# Altium PCB 0007-Optical_Tracker.pcbdoc
Units mm, origin at the board's own origin, x right, y up, seen from the top; angles counter-clockwise.
Board outline 51.4 x 24 mm, 4 copper layers (Top Layer, VDD Plane, GND Plane, Bottom Layer), stack 1.682 mm thick; 67 components, 51 nets, 276 pads, 66 vias.
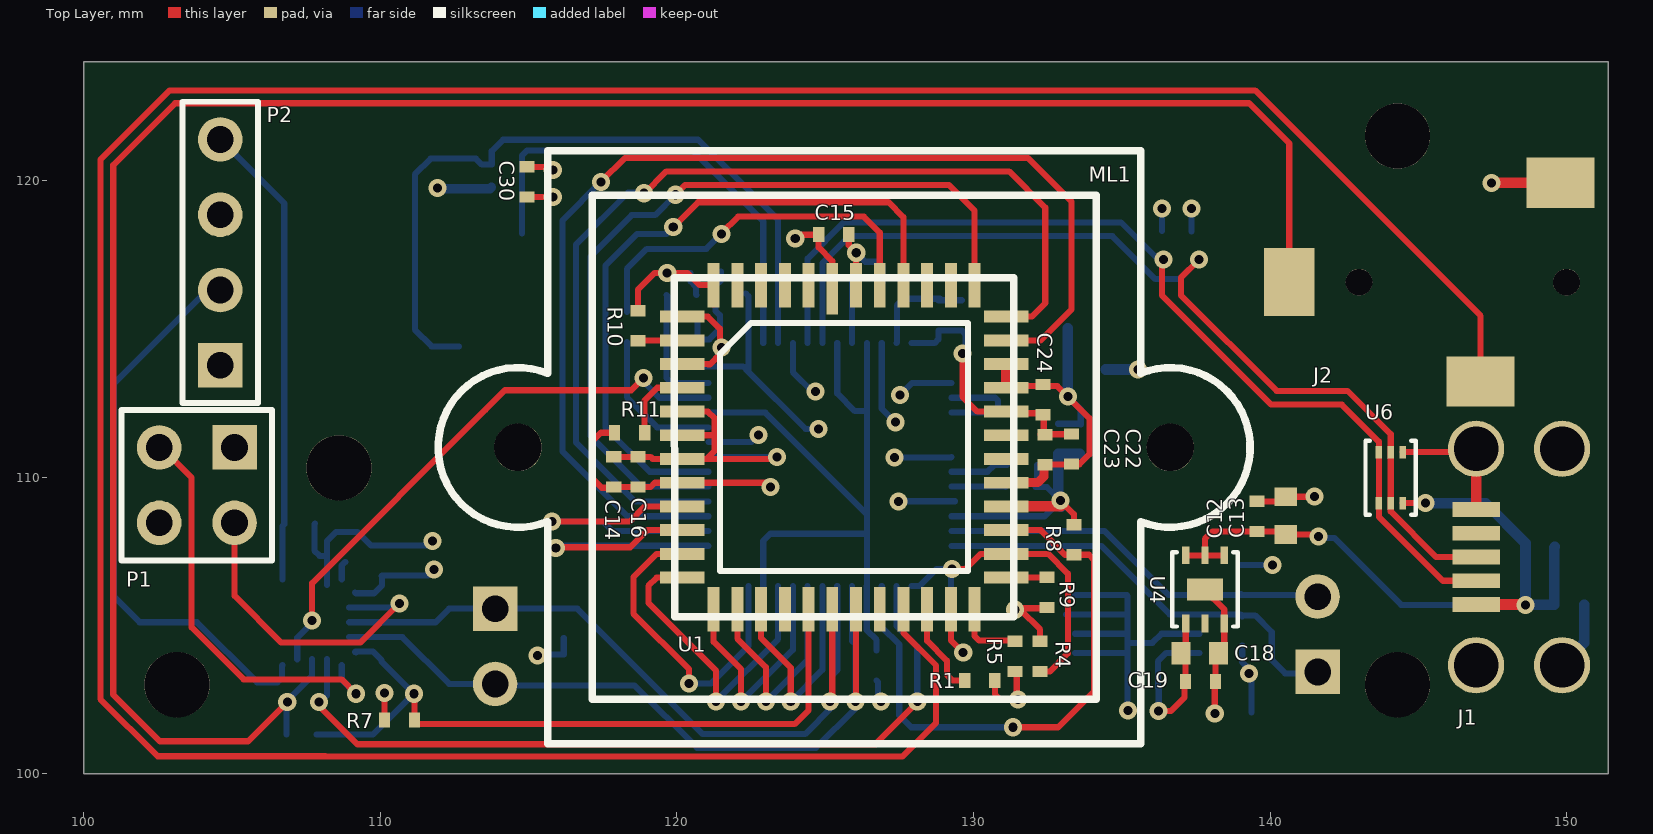
[diagram p0: Top Layer view]
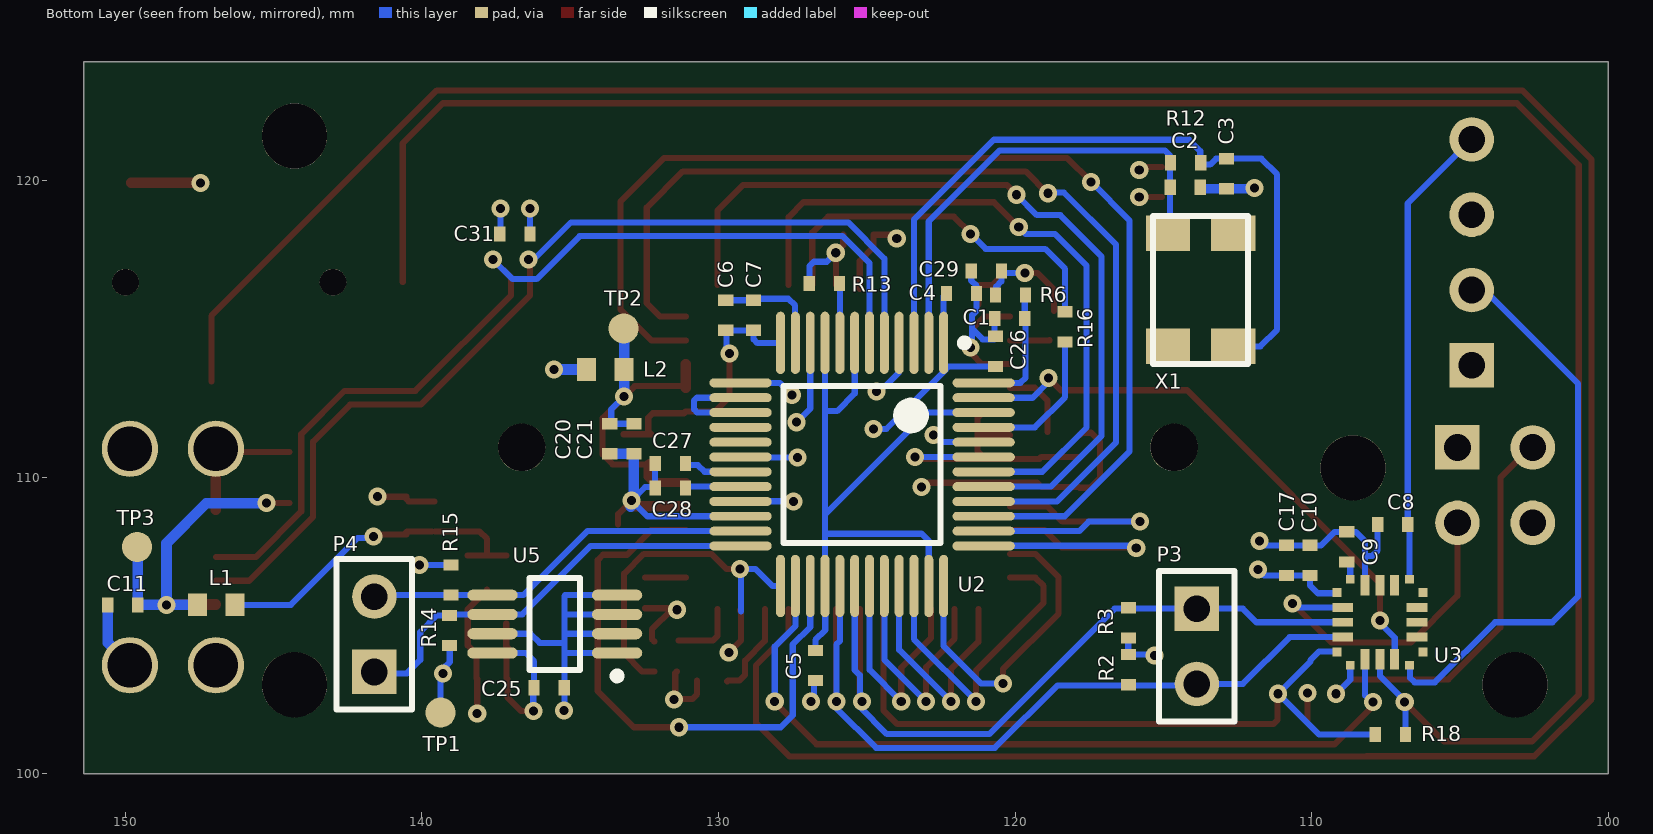
[diagram p1: Bottom Layer view, seen from below]
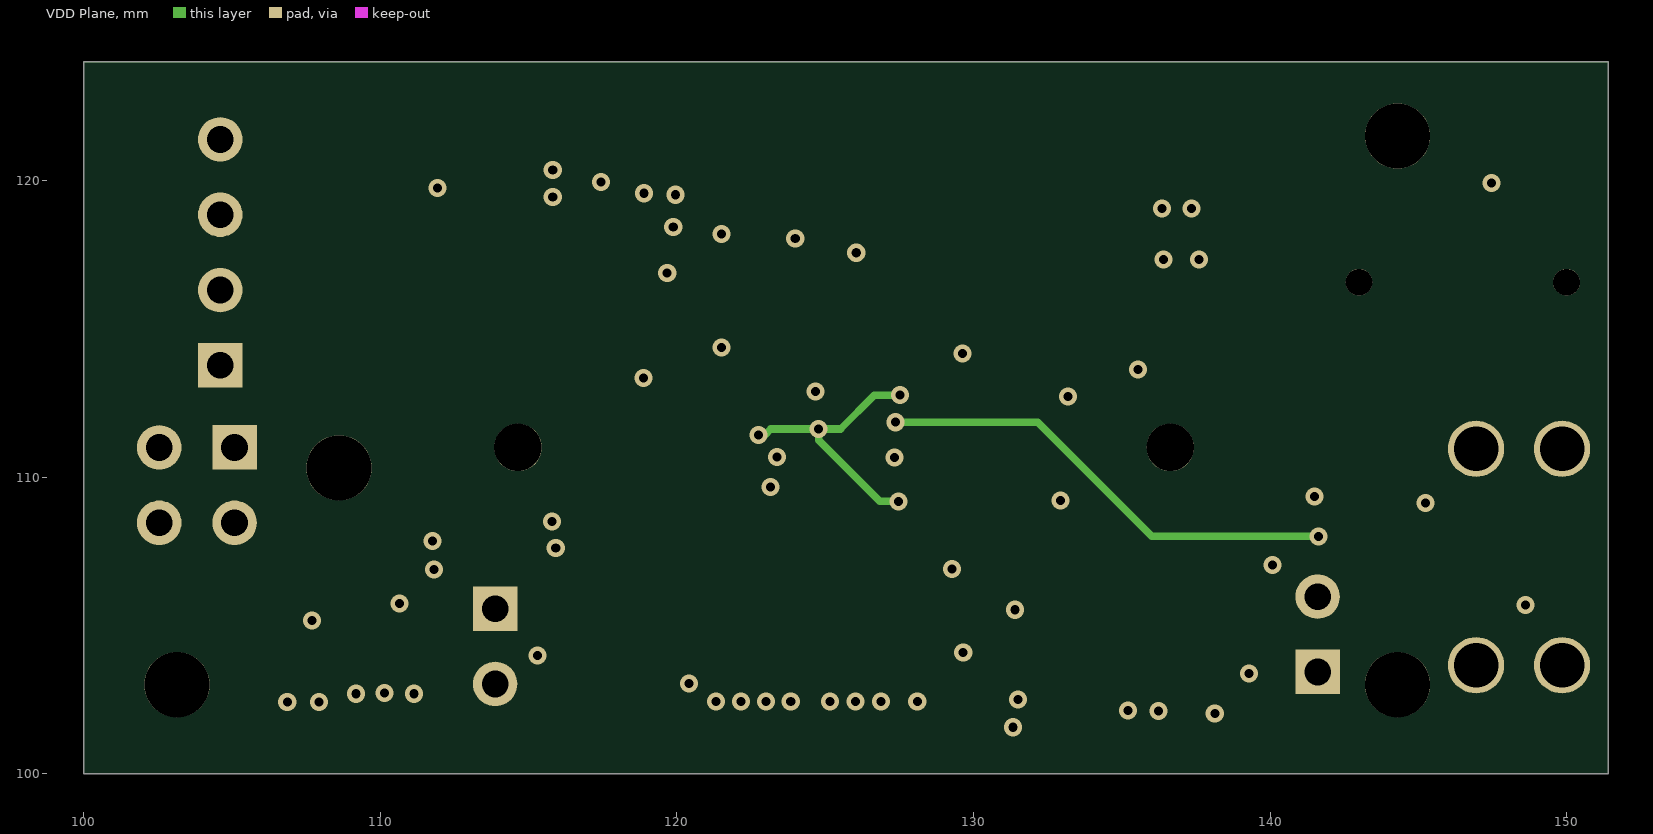
[diagram p2: VDD Plane]

## Layer stack, top to bottom
Top Solder: solder mask 0.0102, Solder Resist, Dk 3.5
Top Layer: signal copper 0.0356
Dielectric1: prepreg 0.17, FR-4, Dk 4.8
VDD Plane: signal copper 0.0356
Dielectric3: core 1.2, FR-4, Dk 4.8
GND Plane: signal copper 0.0356
Dielectric2: prepreg 0.17, FR-4, Dk 4.8
Bottom Layer: signal copper 0.0356
Bottom Solder: solder mask 0.0102, Solder Resist, Dk 3.5

## Board outline
100,100 100,124 151.4,124 151.4,100

## Design rules (kind name [scope] priority, off if disabled: settings)
AssemblyTestPointUsage [All] p0: scope1count=1 scope1_0_kind=Board scope1_0_value=Board scope2count=1 scope2_0_kind=Board scope2_0_value=Board commentlength=0
AssemblyTestpoint [All] p0: scope1count=1 scope1_0_kind=Board scope1_0_value=Board scope2count=1 scope2_0_kind=Board scope2_0_value=Board commentlength=0
Clearance [All] p0: scope1count=1 scope1_0_kind=Board scope1_0_value=Board scope2count=1 scope2_0_kind=Board scope2_0_value=Board commentlength=0 gap=0.152
Clearance [All] p1: gap=0.152 ignorepadtopadclearanceinfootprint=FALSE
ComponentClearance [All] p0: scope1count=1 scope1_0_kind=Board scope1_0_value=Board scope2count=1 scope2_0_kind=Board scope2_0_value=Board commentlength=0 gap=0.254 collisioncheckmode=3
DiffPairsRouting [All] p0: scope1count=1 scope1_0_kind=Board scope1_0_value=Board scope2count=1 scope2_0_kind=Board scope2_0_value=Board commentlength=0
DiffPairsRouting [All] p1: maxlimit=0.254 minlimit=0.254 mostfreqgap=0.254 toplayer_minwidth=0.381 toplayer_maxwidth=0.381 toplayer_prefwidth=0.381 midlayer1_minwidth=0.381 midlayer1_maxwidth=0.381 midlayer1_prefwidth=0.381 midlayer2_minwidth=0.381 midlayer2_maxwidth=0.381 midlayer2_prefwidth=0.381 bottomlayer_minwidth=0.381 bottomlayer_maxwidth=0.381 bottomlayer_prefwidth=0.381 maxuncoupledlength=12.7
FabricationTestPointUsage [All] p0: scope1count=1 scope1_0_kind=Board scope1_0_value=Board scope2count=1 scope2_0_kind=Board scope2_0_value=Board commentlength=0 valid=0 allowmultiple=FALSE
FabricationTestpoint [All] p0: scope1count=1 scope1_0_kind=Board scope1_0_value=Board scope2count=1 scope2_0_kind=Board scope2_0_value=Board commentlength=0 side=3 testpointundercomponent=TRUE minsize=1.016 maxsize=2.54 preferedsize=1.524 minholesize=0 maxholesize=1.016 preferedholesize=0.813 testpointgrid=0.025
FanoutControl Fanout_Default [All] p0: scope1count=1 scope1_0_kind=Board scope1_0_value=Board scope2count=1 scope2_0_kind=Board scope2_0_value=Board commentlength=30 // Fanout_Default (Default Rule)
FanoutControl Fanout_Small [All] p0 off: scope1count=1 scope1_0_kind=Board scope1_0_value=Board scope2count=1 scope2_0_kind=Board scope2_0_value=Board commentlength=84 // Protel DXP Scope 1 Expression Was: (CompPinCount < 5)   Fanout_Small (Default Rule)
FanoutControl Fanout_SOIC [All] p0 off: scope1count=1 scope1_0_kind=Board scope1_0_value=Board scope2count=1 scope2_0_kind=Board scope2_0_value=Board commentlength=71 // Protel DXP Scope 1 Expression Was: IsSOIC   Fanout_SOIC (Default Rule)
FanoutControl Fanout_LCC [All] p0 off: scope1count=1 scope1_0_kind=Board scope1_0_value=Board scope2count=1 scope2_0_kind=Board scope2_0_value=Board commentlength=69 // Protel DXP Scope 1 Expression Was: IsLCC   Fanout_LCC (Default Rule)
FanoutControl Fanout_BGA [All] p0 off: scope1count=1 scope1_0_kind=Board scope1_0_value=Board scope2count=1 scope2_0_kind=Board scope2_0_value=Board commentlength=69 // Protel DXP Scope 1 Expression Was: IsBGA   Fanout_BGA (Default Rule)
Height [All] p0: scope1count=1 scope1_0_kind=Board scope1_0_value=Board scope2count=1 scope2_0_kind=Board scope2_0_value=Board commentlength=0
HoleSize [All] p0: scope1count=1 scope1_0_kind=Board scope1_0_value=Board scope2count=1 scope2_0_kind=Board scope2_0_value=Board commentlength=0 absolutevalues=TRUE maxlimit=2.54 minlimit=0.025 maxpercent=80.000 minpercent=20.000
HoleToHoleClearance [All] p0: scope1count=1 scope1_0_kind=Board scope1_0_value=Board scope2count=1 scope2_0_kind=Board scope2_0_value=Board commentlength=0
LayerPairs [All] p0: scope1count=1 scope1_0_kind=Board scope1_0_value=Board scope2count=1 scope2_0_kind=Board scope2_0_value=Board commentlength=0 enforce=TRUE
MinimumSolderMaskSliver [All] p0: scope1count=1 scope1_0_kind=Board scope1_0_value=Board scope2count=1 scope2_0_kind=Board scope2_0_value=Board commentlength=0
NetAntennae [All] p0: scope1count=1 scope1_0_kind=Board scope1_0_value=Board scope2count=1 scope2_0_kind=Board scope2_0_value=Board commentlength=0
PasteMaskExpansion [All] p0: scope1count=1 scope1_0_kind=Board scope1_0_value=Board scope2count=1 scope2_0_kind=Board scope2_0_value=Board commentlength=0 expansion=0
PlaneClearance [All] p0: scope1count=1 scope1_0_kind=Board scope1_0_value=Board scope2count=1 scope2_0_kind=Board scope2_0_value=Board commentlength=0 clearance=0.508
PlaneConnect [All] p0: scope1count=1 scope1_0_kind=Board scope1_0_value=Board scope2count=1 scope2_0_kind=Board scope2_0_value=Board commentlength=0 planeconnectstyle=Relief reliefexpansion=0.508 reliefentries=4 reliefconductorwidth=0.254 reliefairgap=0.254
PolygonConnect [All] p0: scope1count=1 scope1_0_kind=Board scope1_0_value=Board scope2count=1 scope2_0_kind=Board scope2_0_value=Board commentlength=0 connectstyle=Relief reliefconductorwidth=0.254 reliefentries=4 polygonreliefangle="90 Angle"
PolygonConnect [All] p1: connectstyle=Relief reliefconductorwidth=0.254 reliefentries=4 polygonreliefangle="90 Angle" airgapwidth=0.254
RoutingCorners [All] p0: scope1count=1 scope1_0_kind=Board scope1_0_value=Board scope2count=1 scope2_0_kind=Board scope2_0_value=Board commentlength=0 cornerstyle=45-Degree minsetback=2.54 maxsetback=2.54
RoutingLayers [All] p0: scope1count=1 scope1_0_kind=Board scope1_0_value=Board scope2count=1 scope2_0_kind=Board scope2_0_value=Board commentlength=0 top layer=Automatic mid layer 1=Automatic mid layer 2=Automatic bottom layer=Automatic
RoutingPriority [All] p0: scope1count=1 scope1_0_kind=Board scope1_0_value=Board scope2count=1 scope2_0_kind=Board scope2_0_value=Board commentlength=0
RoutingTopology [All] p0: scope1count=1 scope1_0_kind=Board scope1_0_value=Board scope2count=1 scope2_0_kind=Board scope2_0_value=Board commentlength=0 topology=Shortest
RoutingVias [All] p0: scope1count=1 scope1_0_kind=Board scope1_0_value=Board scope2count=1 scope2_0_kind=Board scope2_0_value=Board commentlength=0 holewidth=0.305 width=0.61 viastyle="Through Hole" minholewidth=0.305 minwidth=0.61 maxholewidth=0.305 maxwidth=0.61
RoutingVias [All] p1: holewidth=0.305 width=0.61 viastyle="Through Hole" minholewidth=0.305 minwidth=0.61 maxholewidth=0.305 maxwidth=0.61
ShortCircuit [All] p0: scope1count=1 scope1_0_kind=Board scope1_0_value=Board scope2count=1 scope2_0_kind=Board scope2_0_value=Board commentlength=0 allowed=FALSE
SilkToBoardRegionClearance [All] p0: scope1count=1 scope1_0_kind=Board scope1_0_value=Board scope2count=1 scope2_0_kind=Board scope2_0_value=Board commentlength=0
SilkToSilkClearance [All] p0: scope1count=1 scope1_0_kind=Board scope1_0_value=Board scope2count=1 scope2_0_kind=Board scope2_0_value=Board commentlength=0
SilkToSolderMaskClearance [All] p0 off: scope1count=1 scope1_0_kind=Board scope1_0_value=Board scope2count=1 scope2_0_kind=Board scope2_0_value=Board commentlength=44 // Protel DXP Scope 1 Expression Was: IsPad
SolderMaskExpansion [All] p0: scope1count=1 scope1_0_kind=Board scope1_0_value=Board scope2count=1 scope2_0_kind=Board scope2_0_value=Board commentlength=0 expansion=0.102
SolderMaskExpansion [All] p1: expansion=0.102 istentingtop=FALSE
UnRoutedNet [All] p0: scope1count=1 scope1_0_kind=Board scope1_0_value=Board scope2count=1 scope2_0_kind=Board scope2_0_value=Board commentlength=0
UnpouredPolygon [All] p0: scope1count=1 scope1_0_kind=Board scope1_0_value=Board scope2count=1 scope2_0_kind=Board scope2_0_value=Board commentlength=0
Width [All] p0: scope1count=1 scope1_0_kind=Board scope1_0_value=Board scope2count=1 scope2_0_kind=Board scope2_0_value=Board commentlength=0 maxlimit=0.356 minlimit=0.207 preferedwidth=0.254
Width [All] p1: maxlimit=0.356 minlimit=0.207 preferedwidth=0.254 toplayer_prefwidth=0.207 midlayer1_minwidth=0.254 midlayer1_maxwidth=0.254 midlayer2_minwidth=0.254 midlayer2_maxwidth=0.254 bottomlayer_prefwidth=0.207 minimp=50.000000 maximp=50.000000 favimp=50.000000
29 further rules are at their usual default settings.

## Classes and differential pairs
differential pair " ": +USBDATA_P -USBDATA_N

## Components (designator, comment, footprint, x,y, rotation, side; value= is the part's Value field where it differs from the comment)
C1 "1uF" CAP_CERAMIC_0402 120.179,115.355 r180 bottom
C2 "12pF" CAP_CERAMIC_0402 114.261,119.774 r0 bottom
C3 "12pF" CAP_CERAMIC_0402 112.864,120.231 r90 bottom
C4 "0.1uF" CAP_CERAMIC_0402 121.804,116.193 r180 bottom
C5 "0.1uF" CAP_CERAMIC_0402 126.732,103.645 r270 bottom
C6 "0.1uF" CAP_CERAMIC_0402 129.755,115.456 r270 bottom
C7 "4.7uF" CAP_CERAMIC_0402 128.815,115.456 r270 bottom
C8 "0.1uF" CAP_CERAMIC_0402 107.264,108.407 r0 bottom
C9 "0.1uF" CAP_CERAMIC_0402 108.814,107.645 r90 bottom
C10 "0.1uF" CAP_CERAMIC_0402 110.058,107.188 r90 bottom
C11 "2200pF" CAP_CERAMIC_0402 150.089,105.689 r0 bottom
C12 "2200pF" CAP_CERAMIC_0402 139.562,108.673 r90 top
C13 "10uF" CAP_CERAMIC_0603 140.527,108.699 r90 top
C14 "0.1uF" CAP_CERAMIC_0402 117.867,110.173 r90 top
C15 "1uF" CAP_CERAMIC_0402 125.284,118.174 r0 top
C16 "1uF" CAP_CERAMIC_0402 118.68,110.173 r90 top
C17 "0.1uF" CAP_CERAMIC_0402 110.846,107.188 r90 bottom
C18 "10uF" CAP_CERAMIC_0603 137.629,104.052 r0 top
C19 "0.1uF" CAP_CERAMIC_0402 137.654,103.112 r0 top
C20 "4.7uF" CAP_CERAMIC_0402 133.666,111.291 r270 bottom
C21 "0.1uF" CAP_CERAMIC_0402 132.853,111.291 r270 bottom
C22 "0.1uF" CAP_CERAMIC_0402 133.299,110.947 r90 top
C23 "0.1uF" CAP_CERAMIC_0402 132.41,110.922 r90 top
C24 "0.1uF" CAP_CERAMIC_0402 132.345,112.611 r270 top
C25 "0.1uF" CAP_CERAMIC_0402 135.712,102.895 r180 bottom
C26 "4.7uF" CAP_CERAMIC_0402 120.661,114.237 r90 bottom
C27 "4.7uF" CAP_CERAMIC_0402 131.623,110.465 r0 bottom
C28 "0.1uF" CAP_CERAMIC_0402 131.623,109.626 r0 bottom
C29 "0.1uF" CAP_CERAMIC_0402 120.966,116.955 r0 bottom
C30 "0.1uF" CAP_CERAMIC_0402 114.946,119.952 r270 top
C31 "0.1uF" CAP_CERAMIC_0402 136.868,118.199 r180 bottom
J1 "0513870578" 0513870578 146.948,107.303 r270 top
J2 "KYCON STX-2500-3NTR" KYCON_STX2500 151.5,116.574 r270 top locked
L1 "BLM18KG221SN1D" INDUCTOR_0603 146.939,105.689 r180 bottom
L2 "BLM18KG221SN1D" INDUCTOR_0603 133.819,113.627 r180 bottom
ML1 "CMT103" CMT103 125.636,111 r0 top locked
P1 "PPTC022LFBN-RC" HDR2X2 105.08,110.998 r180 top
P2 "Header 4" HDR1X4 104.597,113.767 r90 top
P3 "Header 2" HDR1X2 113.868,105.562 r270 bottom
P4 "Header 2" HDR1X2 141.605,103.429 r90 bottom
R1 "10K" RESISTOR_0402 130.212,103.137 r0 top
R2 "2.2K" RESISTOR_0402 116.18,103.505 r90 bottom
R3 "2.2K" RESISTOR_0402 116.18,105.08 r270 bottom
R4 "10K" RESISTOR_0402 132.244,103.95 r270 top
R5 "10K" RESISTOR_0402 131.406,103.95 r90 top
R6 "10K" RESISTOR_0402 120.153,116.142 r0 bottom
R7 "2.2K" RESISTOR_0402 110.642,101.803 r0 top
R8 "2.2K" RESISTOR_0402 133.387,107.887 r270 top
R9 "10K" RESISTOR_0402 132.472,106.109 r270 top
R10 "10K" RESISTOR_0402 118.68,115.101 r90 top
R11 "10K" RESISTOR_0402 118.401,111.494 r180 top
R12 "1M" RESISTOR_0402 114.249,120.599 r180 bottom
R13 "6.2K" RESISTOR_0402 126.427,116.523 r0 bottom
R14 "2.2K" RESISTOR_0402 139.065,104.826 r270 bottom
R15 "2.2K" RESISTOR_0402 139.014,106.528 r90 bottom
R16 "30" RESISTOR_0402 118.313,115.062 r90 bottom
R18 "0" RESISTOR_0402 107.34,101.321 r180 bottom
TP1 "TEST POINT" TEST_POINT_PAD 139.37,102.057 r270 bottom
TP2 "TEST POINT" TEST_POINT_PAD 133.198,115.011 r270 bottom
TP3 "TEST POINT" TEST_POINT_PAD 149.606,107.645 r270 bottom
U1 "MT9V034" CLCC-48 125.637,111 r0 top locked
U2 "eSP570" LQFP-48_M 125.157,110.427 r270 bottom locked
U3 "STM8S003F3" 20-UFQFN 107.696,105.105 r90 bottom
U4 "LP5900SD-3.3" LLP-6 137.806,106.211 r90 top
U5 "24LC128-I/MS" MSOP-MS8_N 135.52,105.042 r0 bottom
U6 "ESDR0502N" UDFN-6 144.069,109.982 r270 top
X1 "12MHz" 4-SMD 113.741,116.307 r90 bottom

## Footprints (in the part's own frame and the unit in brackets; to place one, negate y for a bottom-side part, rotate by r counter-clockwise, add the part's x,y. Pads: shape width x height; smd on the part's side, far side on the other; paste and mask are expansions set on the pad)
4-SMD [mm]
  rect 1.2x1.5 smd: 1(-1.9,-1.1) 2(1.91,-1.1) 3(1.91,1.1) 4(-1.9,1.1)
  silkscreen extent -2.5,-1.6 2.5,1.6
20-UFQFN [mm] "20-lead ultra thin fine pitch quad flat no-lead package (3x3)"
  rect 0.3x0.3 smd mask+0: 1(1.45,-1) 5(1.45,1) 6(1,1.45) 10(-1,1.45) 11(-1.45,1) 15(-1.45,-1) 16(-1,-1.45) 20(1,-1.45)
  rect 0.7x0.3 smd mask+0: 2(1.25,-0.5) 3(1.25,0) 4(1.25,0.5) 12(-1.25,0.5) 13(-1.25,0) 14(-1.25,-0.5)
  rect 0.3x0.7 smd mask+0: 7(0.5,1.25) 8(0,1.25) 9(-0.5,1.25) 17(-0.5,-1.25) 18(0,-1.25) 19(0.5,-1.25)
0513870578 [mm] "CONN RECEPT MINIUSB R/A 5POS SMD"
  rect 0.5x1.6 smd: 1(1.6,0) 2(0.8,0) 3(0,0) 4(-0.8,0) 5(-1.6,0)
  round 1.9 hole 1.5: 5(3.65,0) 6(-3.65,0) 7(-3.65,2.9) 8(3.65,2.9)
CAP_CERAMIC_0402 [mil]
  rect 15x20 smd mask+0: 1(-20,0) 2(20,0)
CAP_CERAMIC_0603 [mil]
  rect 25x30 smd mask+0: 1(-25,0) 2(25,0)
CLCC-48 [mm]
  rect 0.4x1.75 smd: 1(-0.4,5.35)
  rect 0.4x1.5 smd: 2(-1.2,5.475) 3(-2,5.475) 4(-2.8,5.475) 5(-3.6,5.475) 6(-4.4,5.475) 19(-4.4,-5.455) 20(-3.6,-5.455) 21(-2.8,-5.455) 22(-2,-5.455) 23(-1.2,-5.455) 24(-0.4,-5.455) 25(0.4,-5.455) 26(1.2,-5.455) 27(2,-5.455) 28(2.8,-5.455) 29(3.6,-5.455) 30(4.4,-5.455) 43(4.4,5.475) 44(3.6,5.475) 45(2.8,5.475) 46(2,5.475) 47(1.2,5.475) 48(0.4,5.475)
  rect 1.5x0.4 smd: 7(-5.465,4.41) 8(-5.465,3.61) 9(-5.465,2.81) 10(-5.465,2.01) 11(-5.465,1.21) 12(-5.465,0.41) 13(-5.465,-0.39) 14(-5.465,-1.19) 15(-5.465,-1.99) 16(-5.465,-2.79) 17(-5.465,-3.59) 18(-5.465,-4.39) 31(5.465,-4.39) 32(5.465,-3.59) 33(5.465,-2.79) 34(5.465,-1.99) 35(5.465,-1.19) 36(5.465,-0.39) 37(5.465,0.41) 38(5.465,1.21) 39(5.465,2.01) 40(5.465,2.81) 41(5.465,3.61) 42(5.465,4.41)
  silkscreen extent -5.72,-5.71 5.71,5.71
CMT103 [mm]
  round 1.6 hole 1.6 unplated: 1(11,0) 2(-11,0)
  silkscreen extent -13.69,-10 13.69,10
HDR1X2 [mm] "Connector; Header; 2 Position"
  rect 1.5x1.5 hole 0.9: 1(0,0)
  round 1.5 hole 0.9: 2(2.54,0)
  silkscreen extent -1.27,-1.27 3.81,1.27
HDR1X4 [mm] "Connector; Header; 4 Position"
  rect 1.5x1.5 hole 0.9: 1(0,0)
  round 1.5 hole 0.9: 2(2.54,0) 3(5.08,0) 4(7.62,0)
  silkscreen extent -1.27,-1.27 8.89,1.27
HDR2X2 [mm] "Connector; Header; 2x2 Position"
  rect 1.5x1.5 hole 0.9: 1(0,0)
  round 1.5 hole 0.9: 2(0,2.54) 3(2.54,0) 4(2.54,2.54)
  silkscreen extent -1.27,-1.27 3.81,3.81
INDUCTOR_0603 [mil]
  rect 25x30 smd mask+0: 1(-25,0) 2(25,0)
KYCON_STX2500 [mm]
  rect 1.7x2.3 smd paste+0 mask+0: 1(-3.35,-1.7) 2(3.35,-4.4)
  rect 2.3x1.7 smd paste+0 mask+0: 3(0,-10.85)
  round 0.9 hole 0.9 unplated paste+0 mask+0: ""(0,-1.5) ""(0,-8.5)
LLP-6 [mm]
  rect 0.6x0.25 smd mask+0: 1(-1.15,0.65) 2(-1.15,0) 3(-1.15,-0.65) 4(1.15,-0.65) 5(1.15,0) 6(1.15,0.65)
  rect 0.75x1.2 smd mask+0: 7(0,0)
  silkscreen extent -1.25,-1.1 1.25,1.1
LQFP-48_M [mm] "48-Pin Thin Quad Flat Pack 0.5 mm Pitch, IPC Low Density"
  oval 2.1x0.3 smd: 1(-4.1,2.75) 2(-4.1,2.25) 3(-4.1,1.75) 4(-4.1,1.25) 5(-4.1,0.75) 6(-4.1,0.25) 7(-4.1,-0.25) 8(-4.1,-0.75) 9(-4.1,-1.25) 10(-4.1,-1.75) 11(-4.1,-2.25) 12(-4.1,-2.75) 25(4.1,-2.75) 26(4.1,-2.25) 27(4.1,-1.75) 28(4.1,-1.25) 29(4.1,-0.75) 30(4.1,-0.25) 31(4.1,0.25) 32(4.1,0.75) 33(4.1,1.25) 34(4.1,1.75) 35(4.1,2.25) 36(4.1,2.75)
  oval 0.3x2.1 smd: 13(-2.75,-4.1) 14(-2.25,-4.1) 15(-1.75,-4.1) 16(-1.25,-4.1) 17(-0.75,-4.1) 18(-0.25,-4.1) 19(0.25,-4.1) 20(0.75,-4.1) 21(1.25,-4.1) 22(1.75,-4.1) 23(2.25,-4.1) 24(2.75,-4.1) 37(2.75,4.1) 38(2.25,4.1) 39(1.75,4.1) 40(1.25,4.1) 41(0.75,4.1) 42(0.25,4.1) 43(-0.25,4.1) 44(-0.75,4.1) 45(-1.25,4.1) 46(-1.75,4.1) 47(-2.25,4.1) 48(-2.75,4.1)
  silkscreen extent -4.22,-2.65 2.65,3.57
MSOP-MS8_N [mm] "TSOP, 8-Leads, Body 3x3mm, Pitch 0.65mm, IPC Medium Density"
  oval 1.7x0.375 smd: 1(-2.1,0.975) 2(-2.1,0.325) 3(-2.1,-0.325) 4(-2.1,-0.975) 5(2.1,-0.975) 6(2.1,-0.325) 7(2.1,0.325) 8(2.1,0.975)
  silkscreen extent -2.22,-1.55 0.85,1.87
RESISTOR_0402 [mil]
  rect 15x20 smd mask+0: 1(-20,0) 2(20,0)
TEST_POINT_PAD [mil]
  round 40 smd mask+0: 1(0,0)
UDFN-6 [mm]
  rect 0.42x0.22 smd mask+0: 1(-0.86,0.4) 2(-0.86,0) 3(-0.86,-0.4) 4(0.86,-0.4) 5(0.86,0) 6(0.86,0.4)
  silkscreen extent -1.25,-0.85 1.25,0.85

## Part data
C1 C15 C16: library part "CAP, CERAMIC", "CAP CER 1UF 6.3V 20% X5R 0402"
C2 C3: library part "CAP, CERAMIC", "CAP CER 12PF 50V 5% NP0 0402"
C4 C5 C6 C8 C9 C10 C14 C17 C19 C21 C22 C23 C24 C25 C28 C29 C30 C31: library part "CAP, CERAMIC", "CAP CER 0.1UF 6.3V 20% X5R 0402"
C7 C20 C26 C27: library part "CAP, CERAMIC", "CAP CER 4.7UF 6.3V 20% X5R 0402"
C11 C12: library part "CAP, CERAMIC", "CAP CER 2200PF 50V 10% X7R 0402"
C13 C18: library part "CAP, CERAMIC", "CAP CER 10UF 6.3V 20% X5R 0603"
J1: "CONN RECEPT MINIUSB R/A 5POS SMD"
J2: library part AUDIO_JACK_3P, "Phone Connectors SJ 2.5MM SMT 3POS"
L1 L2: library part INDUCTOR, "FERRITE CHIP 220 OHM 2200MA 0603"
ML1: "Lens holder, M12x0.5, 16.2, centered"
P1: library part "Header 2X2", "Header, 2-Pin, Dual row"
P2: "Header, 4-Pin"
P3 P4: "Header, 2-Pin"
R1 R4 R5 R6 R9 R10 R11: library part RESISTOR, "RES 10K OHM 1/10W 1% 0402 SMD"
R2 R3 R7 R8 R14 R15: library part RESISTOR, "RES 2.2K OHM 1/10W 1% 0402 SMD"
R12: library part RESISTOR, "RES 1M OHM 1/10W 1% 0402 SMD"
R13: library part RESISTOR, "RES 6.2K OHM 1/10W 1% 0402 SMD"
R16: library part RESISTOR, "RES 30 OHM 1/10W 1% 0402 SMD"
R18: library part RESISTOR, "RES 0 OHM 1/10W 1% 0402 SMD"
TP1 TP2 TP3: library part TEST_POINT
U1: library part MT9V034_DS_D, "1/3\" WVGA 60FPS CMOS Digital Image Sensor Global Shutter"
U2: "USB 2.0 Camera Bridge Controller"
U3: "MCU 8BIT 8KB 16MHZ"
U4: "IC, LINEAR REGULATOR, 3.3V, 150MA, ULTRA LOW NOISE"
U5: "128Kbit, 400kHz, 2.5V, I2C Serial EEPROM, 8-Pin MSOP, Industrial Temperature"
U6: "TVS ARRAY LOW CAP 6UDFN"
X1: library part 405C35E24M00000, "CRYSTAL 12MHZ 20PF SMD"

## Free pads (board coordinates)
  round 2.2 hole 2.2 unplated: 0(103.136,103) 0(108.602,110.309) 0(144.3,103) 0(144.3,121.5)

## Via types
v1: diameter 0.61, hole 0.305, Top Layer to Bottom Layer, 66 vias

## Nets (pads, with @x,y where several pads share a name; then routed paths per layer and width w, separated by ;. In a path a pad name is that pad's centre, name@x,y a point inside that pad or via, vN(x,y) a via of type N, cw(c..) or ccw(c..) an arc to the next point about the centre after c; other vN are vias at no path point)
ADR0: R5.2 U1.30 | length 2.3
  Top Layer w0.207: U1.30 130.034,105.541 130.034,104.636 130.186,104.483 R5.2@131.355,104.483
ADR1: R9.1 U1.31 | length 1.4
  Top Layer w0.207: U1.31 131.11,106.617 R9.1
BYPASS_CLKIN_N: R10.1 U1.8 | length 1.3
  Top Layer w0.207: R10.1@118.833,114.618 118.841,114.61 U1.8
CLK_27: R16.2 U1.47 | length 12.7
  Top Layer w0.207: v1(121.5,118.199) 121.5,118.225 122.058,118.784 126.3,118.784 126.838,118.246 U1.47
  Bottom Layer w0.207: R16.2 118.313,117.02 118.985,117.691 120.992,117.691 v1(121.5,118.199)
CLK_27E: R16.1 U2.45 | length 5
  Bottom Layer w0.207: R16.1 118.313,112.699 119.335,111.677 U2.45
D2: U1.43 U2.41 | length 27.6
  Top Layer w0.207: v1(119.95,119.52) 120.28,119.85 129.17,119.85 130.038,118.983 U1.43
  Bottom Layer w0.207: v1(119.95,119.52) 119.264,118.834 118.477,118.834 117.08,117.437 117.08,111.392 118.795,109.677 U2.41
D3: U1.42 U2.40 | length 34.2
  Top Layer w0.207: v1@118.883,119.546 119.645,120.308 131.202,120.308 132.422,119.088 132.422,115.867 131.964,115.41 U1.42
  Bottom Layer w0.207: v1@118.934,119.444 118.782,119.596 118.35,119.596 116.597,117.844 116.597,111.164 118.584,109.177 U2.40
  other v1: 118.883,119.571
D4: U1.41 U2.39 | length 38.5
  Top Layer w0.207: v1(117.436,119.952) 118.248,120.765 131.837,120.765 133.311,119.292 133.311,115.659 132.261,114.61 U1.41
  Bottom Layer w0.207: v1(117.436,119.952) 116.14,118.657 116.14,110.858 118.321,108.677 U2.39
D5: U1.15 U2.38 | length 10
  Top Layer w0.207: v1(115.785,108.497) 118.401,108.497 118.914,109.01 U1.15
  Bottom Layer w0.207: v1(115.785,108.497) 117.512,108.497 117.831,108.177 U2.38
D6: U1.16 U2.37 | length 10
  Top Layer w0.207: v1@115.886,107.506 115.912,107.531 115.912,107.633 118.426,107.633 119.003,108.21 U1.16
  Bottom Layer w0.207: v1@115.886,107.506 116.064,107.684 121.05,107.684 U2.37 ; v1@115.912,107.531 v1(115.912,107.608)
D7: U1.17 U2.36 | length 10.9
  Top Layer w0.207: U1.17 119.315,107.41 118.528,106.623 118.528,105.398 120.407,103.518 v1(120.407,103.036)
  Bottom Layer w0.207: v1(120.407,103.036) 121.144,103.036 122.407,104.299 U2.36
D8: U1.18 U2.34 | length 10.8
  Top Layer w0.207: U1.18 119.315,106.61 119.036,106.331 119.036,105.753 121.322,103.467 v1@121.322,102.451
  Bottom Layer w0.207: v1@121.322,102.451 123.407,104.537 U2.34
  other v1: 121.322,102.426
D9: U1.19 U2.33 | length 8.1
  Top Layer w0.207: U1.19 121.237,104.441 122.16,103.518 v1(122.16,102.426)
  Bottom Layer w0.207: v1(122.16,102.426) 122.16,102.431 123.907,104.179 U2.33
ESCL: P4.1 R14.1 U2.24 U5.6 | length 14.6
  Bottom Layer w0.207: U2.24 134.309,107.677 136.619,105.367 U5.6 139.006,105.367 R14.1@139.065,105.308 ; R14.1 139.497,105.334 140.056,104.775 140.056,103.835 140.513,103.378 141.503,103.378 P4.1@141.529,103.353
ESDA: P4.2 R15.1 U2.23 U5.5 | length 13.3
  Bottom Layer w0.207: U2.23 134.418,108.177 136.578,106.017 U5.5 138.973,106.017 R15.1@139.014,106.058 ; R15.1 141.3,106.02 P4.2@141.529,105.791
ESP1V8: C4.1 C26.1 U2.1 U2.13 U2.21 U2.44 | length 22.4
  VDD Plane w0.254: v1(122.744,111.418) 122.955,111.418 123.158,111.621 v1(124.776,111.621) ; v1(127.469,109.182) 126.834,109.182 124.776,111.241 v1(124.776,111.621) ; v1(127.519,112.764) 126.658,112.764 125.515,111.621 v1(124.776,111.621)
  Bottom Layer w0.207: C26.1@120.814,113.729 122.231,113.729 U2.1@122.407,113.553 ; U2.44 122.504,111.177 v1(122.744,111.418) ; C4.1 122.407,116.098 U2.1 U2.1@122.407,113.553 ; v1(124.776,111.621) 124.339,111.621 U2.1@122.407,113.553 ; v1(127.469,109.182) U2.21@129.374,109.182 ; v1(127.519,112.764) 127.933,113.177 U2.13
ESP2V8: C6.1 C7.1 U2.11 | length 3.6
  Bottom Layer w0.207: U2.11 127.418,114.538 127.418,115.786 127.646,116.015 C7.1@128.866,116.015 ; C7.1 C6.1@129.602,115.964
ESP3V3: C5.1 U2.7 U2.9 U2.28 U2.35 U2.46 | length 25.4
  Bottom Layer w0.207: U2.46 122.975,112.177 126.407,108.745 ; U2.35 122.907,107.847 123.151,108.09 126.407,108.09 ; U2.7 125.407,112.819 126.002,112.225 126.407,112.225 ; U2.9 126.407,108.745 ; C5.1 126.732,104.509 126.402,104.839 126.402,106.322 U2.28 126.407,108.745
ESPVAA: U2.14 U2.15 | length 3.5
  Bottom Layer w0.207: U2.15 130.717,112.177 130.821,112.281 130.821,112.586 130.73,112.677 U2.14
EXP: R7.2 R18.1 U1.23 U3.10 | length 24.3
  Top Layer w0.207: v1(111.125,102.692) 111.15,102.667 R7.2 111.286,101.668 123.967,101.668 124.437,102.138 U1.23
  Bottom Layer w0.207: R18.1 109.753,101.321 v1(111.125,102.692) 110.033,103.784 110.033,103.835 109.753,104.115 109.155,104.115 U3.10 U3.10@109.171,104.08
EXT_SYNC: J2.3 R18.2 U3.13 | length 73.6
  Top Layer w0.207: v1(106.858,102.413) 105.537,101.092 102.565,101.092 100.99,102.667 100.99,120.523 103.073,122.606 139.294,122.606 140.65,121.249 J2.3
  Bottom Layer w0.207: R18.2 106.832,102.387 v1(106.858,102.413) ; v1@106.934,102.337 106.934,102.54 107.696,103.302 U3.13
FV: U1.21 U2.31 | length 7.9
  Top Layer w0.207: U1.21 122.837,104.568 123.836,103.569 v1(123.836,102.426)
  Bottom Layer w0.207: v1@123.709,102.375 v1@123.76,102.375 ; v1(123.836,102.426) 124.907,103.497 U2.31
GND: C1.1 C2.1 C3.1 C4.2 C5.2 C6.2 C7.2 C8.2 C9.2 C10.2 C11.2 C12.2 C13.2 C14.2 C15.2 C16.2 C17.2 C18.2 C19.2 C20.2 C21.2 C22.2 C23.2 C24.2 C25.2 C26.2 C27.2 C28.2 C29.2 C30.2 C31.2 J1.5 J1.6 J1.7 J1.8 J2.1 P1.4 P2.3 R4.1 R7.1 R8.1 R9.2 R13.2 U1.7 U1.9 U1.11 U1.12 U1.13 U1.29 U1.34 U1.38 U1.48 U2.4 U2.12 U2.18 U2.22 U2.43 U3.4 U4.3 U4.7 U5.1 U5.2 U5.3 U5.4 U5.7 U6.1 | length 93.1
  Top Layer w0.207: R7.1 v1(110.134,102.718) ; C30.2@115.048,119.444 v1(115.81,119.444) ; C14.2@117.842,110.681 C14.2 C16.2 119.112,110.681 119.183,110.61 U1.13 120.997,110.61 ; U1.12 121.271,111.41 ; U1.11 121.042,112.21 121.271,111.981 121.271,110.884 120.997,110.61 ; U1.9 121.042,113.81 121.047,113.805 121.119,113.805 121.449,114.135 121.449,115.004 121.042,115.41 U1.7 ; v1(123.379,110.681) 123.308,110.61 120.997,110.61 ; C15.2 125.792,117.818 v1(126.046,117.564) 126.038,117.556 U1.48 ; U1.29@129.272,105.511 U1.29 129.238,104.492 v1(129.653,104.077) ; v1(129.628,114.161) 129.628,112.713 130.131,112.21 U1.38 131.158,112.154 132.218,112.154 132.371,112.002 132.371,111.545 132.269,111.443 C22.2@133.209,111.443 ; v1(131.406,105.525) 131.583,105.525 132.244,104.864 132.244,104.534 R4.1@132.168,104.458 ; v1@131.558,105.576 R9.2@132.472,105.576 ; v1(132.93,109.208) 133.387,108.751 R8.1 ; v1@132.95,109.01 v1@132.955,109.005 ; U4.7 137.806,106.185 138.456,105.535 U4.3 138.456,104.321 138.162,104.026 138.162,103.213 138.137,103.188 v1@138.137,102.045 ; C12.2@139.587,109.181 140.451,109.181 C13.2@140.603,109.334 ; C13.2 C13.2@140.603,109.334 ; v1(141.503,109.347) 141.49,109.334 C13.2@140.603,109.334 ; U6.1 146.837,110.842 J1.6 ; v1(147.472,119.913) v1@147.483,119.924
  Top Layer w0.356: U1.34 v1@132.95,109.01 ; J1.5@146.948,108.903 J1.6 ; v1@147.483,119.924 J2.1
  Bottom Layer w0.207: C8.2@107.798,108.433 C8.2 107.772,107.518 107.95,107.34 108.196,107.34 ; U3.4 108.196,107.34 ; 108.196,107.848 108.196,107.34 ; 108.204,107.848 108.509,108.153 109.22,108.153 109.677,107.696 C17.2 111.608,107.696 v1(111.76,107.848) ; C26.2 120.687,114.77 C1.1 ; C26.2@120.687,114.643 121.089,114.643 121.449,115.004 ; U2.43 123.375,110.677 v1(123.379,110.681) ; C29.2@121.474,116.929 121.474,116.625 121.296,116.447 C4.2 121.296,115.609 121.449,115.456 121.449,115.004 ; v1(121.5,114.364) 121.449,114.415 121.449,115.004 ; U2.4 123.907,113.541 v1@124.579,112.869 ; v1(126.046,117.564) 126.351,117.26 126.783,117.26 126.935,117.107 R13.2 ; C5.2 126.783,103.086 126.783,102.477 v1@126.859,102.401 ; v1(127.342,110.656) 129.236,110.656 U2.18 ; U2.12 127.987,114.527 127.977,114.516 128.688,114.516 128.815,114.643 C7.2 129.602,114.948 129.729,114.821 129.729,114.262 v1(129.628,114.161) ; U2.22 132.399,108.677 v1(132.93,109.208) 132.472,109.665 132.091,109.665 132.142,109.716 C27.2@132.142,110.402 ; v1@131.355,105.474 v1(131.406,105.525) ; U5.3@133.12,105.359 135.19,105.359 ; U5.1 135.161,104.067 135.19,104.038 ; U5.2 135.183,104.717 135.19,104.724 ; U5.4 135.167,106.017 135.19,105.994 135.19,105.359 ; C20.2@133.615,110.757 133.59,110.783 C20.2@133.615,110.783 ; v1@135.19,102.133 135.19,104.038 ; C31.2@136.36,118.301 v1(136.36,119.063) ; U5.7 136.34,104.717 136.03,104.407 135.19,104.407 ; 135.19,104.038 135.19,104.407 ; 135.19,104.407 135.19,104.724 ; 135.19,104.724 135.19,105.359
  Bottom Layer w0.305: v1(111.924,119.749) 111.949,119.723 C3.1 113.702,119.723 C2.1
  Bottom Layer w0.356: v1@132.955,109.005 132.955,109.208 132.853,109.309 C21.2 C20.2@133.59,110.783 ; J1.8@149.809,103.632 150.597,104.419 C11.2
  other v1: 138.137,102.02 135.204,102.133 126.884,102.426 124.675,112.891
GPIO0: U2.47 U3.14 | length 19.4
  Top Layer w0.207: v1(107.696,105.156) 107.696,106.426 113.538,112.268 114.198,112.928 118.458,112.928 v1(118.874,113.344)
  Bottom Layer w0.207: U3.14 107.196,104.58 107.696,105.08 v1(107.696,105.156) ; v1(118.874,113.344) 118.874,113.206 119.405,112.674 121.055,112.674 U2.47
GPIO3: U2.26 U3.12 | length 27.1
  Top Layer w0.207: v1@107.886,102.324 109.22,100.99 126.693,100.99 v1@128.091,102.388
  Bottom Layer w0.207: v1@107.925,102.362 108.196,102.633 U3.12 ; U2.26 127.407,104.977 128.104,104.28 v1@128.104,102.477
  other v1: 107.925,102.413 128.104,102.426
IR_SYNC: P1.3 U3.11 | length 14.2
  Top Layer w0.207: P1.3@102.616,110.998 103.632,109.982 103.632,104.927 105.385,103.175 108.687,103.175 v1(109.169,102.692)
  Bottom Layer w0.207: P1.3 P1.3@102.616,110.998 ; U3.11 108.696,103.165 v1(109.169,102.692)
LED_OUT: J2.2 U1.27 | length 104.8
  Top Layer w0.207: U1.27 127.638,104.746 128.739,103.645 128.739,101.715 127.606,100.582 108.15,100.582 108.148,100.584 102.489,100.584 100.559,102.514 100.559,120.701 102.895,123.038 139.497,123.038 147.1,115.434 J2.2
LV: U1.20 U2.32 | length 8
  Top Layer w0.207: U1.20 122.037,104.555 122.998,103.594 v1(122.998,102.426)
  Bottom Layer w0.207: v1(122.998,102.426) 124.407,103.835 U2.32
NetC27_1: C27.1 U2.19 | length 2
  Bottom Layer w0.207: U2.19 130.47,110.177 130.694,110.402 C27.1@131.126,110.402
NetC28_1: C28.1 U2.20 | length 1.8
  Bottom Layer w0.207: U2.20 131.063,109.677 C28.1@131.075,109.665
OE: R1.1 U1.28 | length 3.2
  Top Layer w0.207: U1.28 128.438,104.48 129.105,103.813 129.105,103.33 129.297,103.137 129.678,103.137 R1.1@129.704,103.112
PCLK: U1.46 U2.42 | length 23
  Top Layer w0.207: v1(119.874,118.428) 120.712,119.266 127.138,119.266 127.638,118.767 U1.46
  Bottom Layer w0.207: v1(119.874,118.428) 119.645,118.199 118.655,118.199 117.588,117.133 117.588,111.672 119.083,110.177 U2.42
REXT: R13.1 U2.8 | length 2
  Bottom Layer w0.207: U2.8 R13.1@125.907,116.536
RSTN: C1.2 R6.1 U2.48 | length 4.3
  Bottom Layer w0.207: R6.1 119.671,116.117 C1.2 119.645,115.329 119.645,114.821 119.645,113.348 119.816,113.177 U2.48
SCL: P3.2 R2.1 U1.25 U2.29 U3.9 | length 26.5
  Top Layer w0.207: v1@126.038,102.426 U1.25
  Bottom Layer w0.207: U3.9 110.736,104.605 112.319,103.022 P3.2 ; P3.2@113.868,102.972 118.567,102.972 120.675,100.863 124.687,100.863 126.021,102.197 v1(126.021,102.426) 126.021,104.356 125.907,104.47 U2.29
SDA: P3.1 R3.1 U1.24 U2.30 U3.8 | length 25.8
  Top Layer w0.207: U1.24 125.237,102.574 v1@125.271,102.54
  Bottom Layer w0.207: U3.8 111.862,105.105 112.319,105.562 P3.1 116.636,105.562 120.865,101.334 124.319,101.334 125.233,102.248 125.233,103.315 125.407,103.489 U2.30
  other v1: 125.157,102.426
SER_DATAIN_N: R11.1 U1.10 | length 2.5
  Top Layer w0.207: R11.1@118.909,111.519 118.909,112.586 119.333,113.01 U1.10
SRST_B: R4.2 U1.32 U2.25 | length 11.4
  Top Layer w0.207: v1(129.272,106.896) 129.724,106.896 130.237,107.41 U1.32 132.518,107.41 133.184,106.744 133.184,104.052 132.574,103.442 R4.2@132.168,103.442
  Bottom Layer w0.207: U2.25 128.18,106.327 128.749,106.896 v1(129.272,106.896) ; 129.247,105.474 v1@129.247,106.871
STATUS_LED: P1.2 U3.7 | length 11
  Top Layer w0.207: P1.2 105.08,105.994 106.655,104.419 109.322,104.419 v1(110.642,105.74)
  Bottom Layer w0.207: U3.7 110.507,105.605 v1(110.642,105.74)
STBY: R8.2 U1.33 U2.27 | length 19.7
  Top Layer w0.207: U1.33 132.276,108.21 132.276,108.185 133.082,107.379 R8.2 133.895,107.379 134.073,107.201 134.073,102.782 132.853,101.562 131.355,101.562 v1@131.329,101.537
  Bottom Layer w0.207: U2.27 126.907,104.943 127.494,104.356 127.494,101.969 127.9,101.562 v1(131.329,101.562) v1@131.38,101.562
UC_RST_B: C8.1 P2.4 U3.1 | length 15.7
  Bottom Layer w0.207: P2.4 106.756,119.228 C8.1 ; U3.1 C8.1@106.696,108.347
UC_SWIM: P2.2 U3.15 | length 19.4
  Bottom Layer w0.207: P2.2 104.165,116.307 101.016,113.157 101.016,105.969 101.879,105.105 103.81,105.105 105.842,103.073 106.528,103.073 106.68,103.226 106.68,103.639 U3.15
USBDATA_N: J1.2 U2.5 U6.3 U6.4 | length 33.2
  Top Layer w0.207: v1(136.41,117.337) 136.358,117.285 136.358,116.118 140.034,112.442 142.422,112.442 143.669,111.195 U6.3 U6.4 143.669,108.663 145.829,106.503 J1.2
  Bottom Layer w0.207: U2.5 124.407,117.37 125.623,118.586 134.974,118.586 136.223,117.337 v1(136.41,117.337)
USBDATA_P: J1.3 U2.6 U6.2 U6.5 | length 33.2
  Top Layer w0.207: v1(137.605,117.336) 136.995,116.726 136.995,116.133 140.225,112.903 142.613,112.903 144.069,111.447 U6.2 U6.5 144.069,108.839 145.605,107.303 J1.3
  Bottom Layer w0.207: U2.6 124.907,117.218 125.814,118.125 134.685,118.125 136.135,116.675 136.943,116.675 v1(137.605,117.336)
VCAP: C9.1 U3.5 | length 0.6
  Bottom Layer w0.207: U3.5 108.696,107.02 C9.1
VCC3V3A: C20.1 C21.1 C22.1 C23.1 C24.1 L2.2 TP2.1 U1.35 U1.39 U1.40 | length 13.1
  Top Layer w0.207: U1.39 131.161,113.069 132.828,113.069 v1(133.184,112.713) 133.909,111.988 133.909,110.771 133.565,110.427 132.269,110.427 C23.1@132.345,110.503 ; 132.345,109.995 132.371,110.021
  Top Layer w0.305: U1.35 132.16,109.81 132.345,109.995 ; 132.371,110.021 C23.1@132.371,110.427
  Top Layer w0.356: U1.39 U1.40
  Bottom Layer w0.207: C21.1 133.59,111.799 133.615,111.773 133.615,112.281 v1(133.184,112.713)
  Bottom Layer w0.356: v1(133.184,112.713) L2.2 TP2.1@133.184,115.011
VCC3V3D: C10.1 C14.1 C15.1 C16.1 C17.1 C18.1 C19.1 C25.1 C29.1 C30.1 C31.1 L2.1 P1.1 P2.1 R1.2 R2.2 R3.2 R5.1 R6.2 R10.2 R11.2 R14.2 R15.2 TP1.1 U1.1 U1.6 U1.14 U3.6 U4.1 U5.8 | length 37.4
  Top Layer w0.207: C30.1@115.048,120.46 115.708,120.46 v1(115.81,120.358) ; R11.2@117.817,111.418 117.74,111.494 117.436,111.494 117.131,111.189 117.131,109.97 117.461,109.64 117.817,109.64 117.842,109.665 C14.1 C16.1 119.112,109.665 119.257,109.81 U1.14 123.006,109.81 v1(123.151,109.665) ; R10.2 118.68,116.32 119.239,116.879 v1(119.671,116.879) 120.357,116.879 120.76,116.475 U1.6 U1.6@121.237,115.82 ; v1(123.989,118.047) 123.862,118.047 123.989,118.174 C15.1 124.776,117.742 125.237,117.281 U1.1 ; R1.2 130.72,102.68 130.885,102.515 131.52,102.515 v1@131.533,102.528 ; R5.1 131.456,103.391 v1@131.456,102.604 ; v1@131.456,102.502 v1(131.507,102.502) ; v1(136.246,102.108) 136.652,102.108 137.121,102.577 137.121,103.188 137.146,103.213 137.146,103.975 136.994,104.128 137.156,104.291 U4.1 ; v1(139.294,103.378) v1@139.37,103.302
  Bottom Layer w0.207: U3.6 109.171,106.08 109.788,106.08 110.058,106.35 110.058,106.648 110.042,106.664 C10.1 C17.1 111.608,106.68 v1(111.811,106.883) ; v1(115.291,103.988) 115.316,104.013 R2.2 R3.2 ; v1(119.671,116.879) 120.458,116.879 120.458,116.599 120.636,116.421 120.636,116.167 R6.2 ; v1@131.494,102.464 131.507,102.451 v1(131.507,102.502) ; v1(136.246,102.108) 136.246,102.87 C25.1 136.22,103.784 136.503,104.067 U5.8 ; C31.1@137.351,118.276 v1(137.351,119.063) ; R15.2 v1(140.081,107.036) ; R14.2 139.065,103.759 139.294,103.53 v1(139.294,103.378) ; TP1.1 v1@139.37,103.302
  Bottom Layer w0.356: L2.1 v1(135.546,113.627)
VCC5V_USB: C11.1 J1.1 L1.1 TP3.1 U6.6 | length 12.4
  Top Layer w0.207: U6.6 v1@145.234,109.122
  Top Layer w0.356: v1@145.234,109.122 v1(145.237,109.118) ; J1.1 148.602,105.703 v1(148.615,105.689)
  Bottom Layer w0.356: v1(145.237,109.118) 147.269,109.118 148.615,107.772 v1(148.615,105.689) ; L1.1 v1(148.615,105.689) ; TP3.1 149.581,107.62 C11.1 v1(148.615,105.689)
VCC5V_USB_FILT: C12.1 C13.1 L1.2 U2.10 U4.4 U4.5 U4.6 | length 30.1
  Top Layer w0.207: U4.6 U4.5 ; U4.4 U4.5 ; C12.1 139.561,108.166 138.06,108.166 137.806,107.912 U4.5 ; C12.1@139.663,108.165 140.501,108.165 C13.1@140.565,108.102 ; C13.1 141.567,108.064 v1(141.63,108.001)
  VDD Plane w0.254: v1(127.367,111.849) 132.168,111.849 136.017,108.001 v1(141.63,108.001)
  Bottom Layer w0.207: U2.10 126.907,112.309 v1(127.367,111.849) ; v1(141.63,108.001) 141.681,107.95 142.164,107.95 144.424,105.689 L1.2
XSCI: C3.2 R12.2 U2.3 X1.1 | length 25.4
  Bottom Layer w0.207: X1.1 111.73,114.407 111.162,114.974 111.162,120.206 111.695,120.739 C3.2 113.219,120.739 113.422,120.536 113.753,120.536 113.753,120.993 114.134,121.374 120.712,121.374 123.407,118.679 U2.3
XSCO: C2.2 R12.1 U2.2 X1.3 | length 15.9
  Bottom Layer w0.207: X1.3@114.769,118.217 C2.2 114.769,120.536 114.769,120.837 114.946,121.015 120.513,121.015 122.907,118.621 U2.2
pads on no net: J1.4 J2. ML1.1 ML1.2 U1.2 U1.3 U1.4 U1.5 U1.22 U1.26 U1.36 U1.37 U1.44 U1.45 U2.16 U2.17 U3.2 U3.3 U3.16 U3.17 U3.18 U3.19 U3.20 U4.2 X1.2 X1.4

## Polygon pours and split planes (outlines as drawn)
VCC3V3D on VDD Plane "vcc3v3d" (solid, pour order 5): 100,100 100,124 151.4,124 151.4,100
GND on GND Plane "GND" (solid, pour order 8): 100,100 100,124 151.4,124 151.4,100

## Silkscreen, mask and mechanical layers (free items; w line width, h text height)
Mechanical 2:
  the board outline again, w0.1